# EAGLE board Door_switch_v1 (EAGLE 7.2.0)
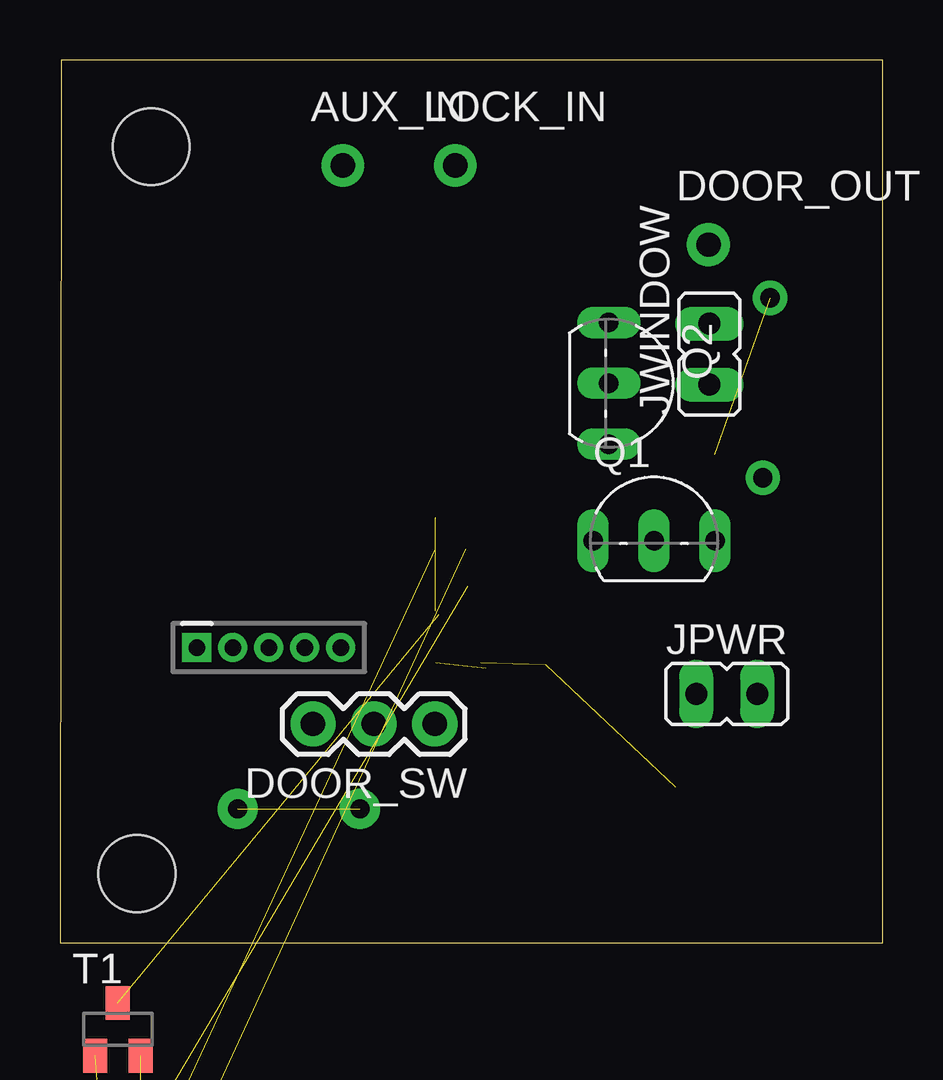
[diagram p0: board, top side]
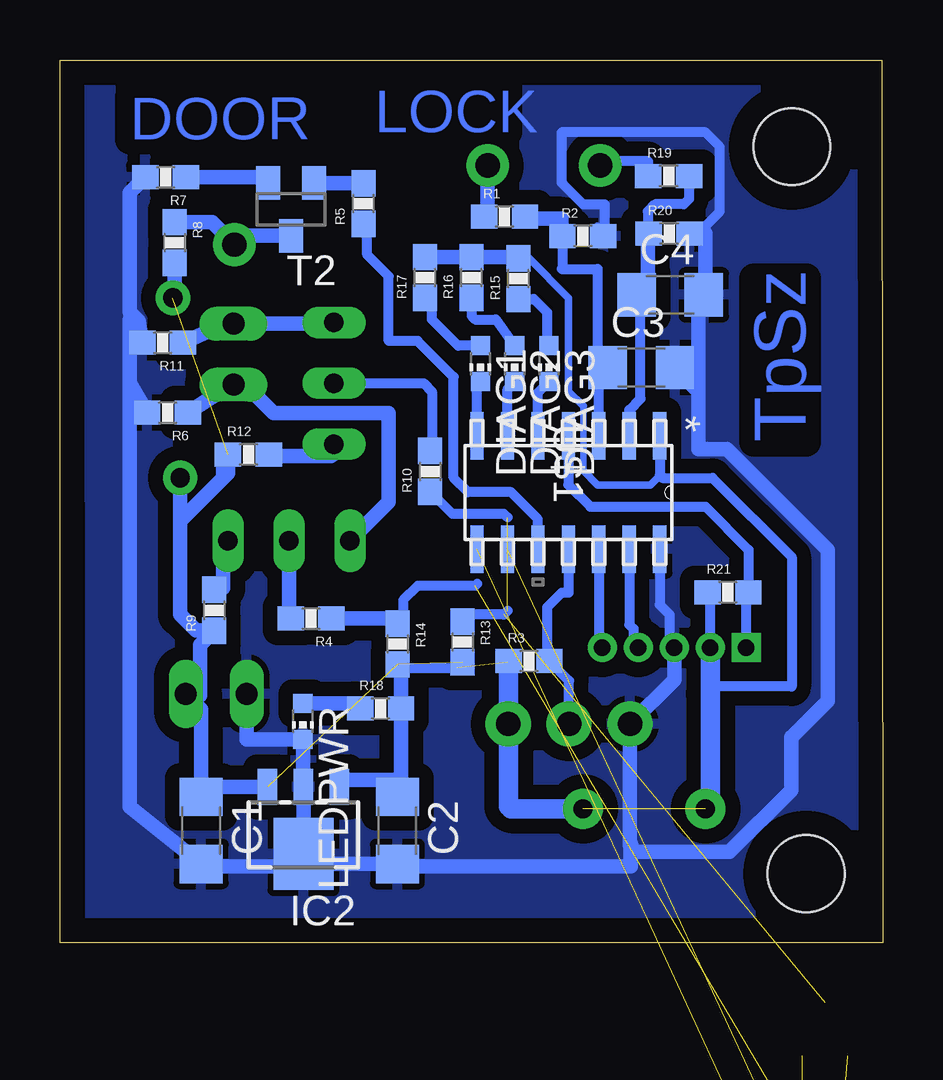
[diagram p1: board, bottom side, seen from below]

Size 34.31 x 36.81 mm. Coordinates in mm from the lower left corner, seen from the top.
Outline: 0,0 34.31,0.02 34.31,36.81 0.04,36.81 0,0
Copper layers (1*16): Top 0.035mm / dielectric 1.5mm / Bottom 0.035mm
Design rules "default": minimum track width 10mil, minimum drill 24mil, track to track 8mil, track to pad 8mil, pad to pad 8mil, via to via 8mil, smd to smd 8mil, copper to edge 40mil, drill to drill 8mil, minimum pad ring 10mil, minimum via ring 8mil, stop-mask expansion 4mil, vias tented up to drill 0mil, thermal gap 10mil
Holes 3.2 mm at 3.2,2.89 3.8,33.19

## Footprints (pad centres in the part's own frame; a part is rotated, then mirrored left to right if it is on the bottom)
1X01-CLEANBIG = drill 1.016 pad 1.778: 1 0,0
C1206 = smd 1.6 x 1.8: 1 -1.4,0; 2 1.4,0
CHIP-LED0603 = smd 0.8 x 0.8: A 0,-0.75; C 0,0.75
1X03 = drill 1.016 pad 1.88: 1 0,0; 2 2.54,0; 3 5.08,0
SOT89 = smd 0.8 x 1.5: 1 -1.5,-1.75; 2 0,-1.75; 3 1.5,-1.75 | smd 2.5 x 3: 4 0,1.05
PIC-ICSP-MINI = drill 0.7 square: 1 -3,0 | drill 0.7: 2 -1.5,0; 3 0,0; 4 1.5,0; 5 3,0
JP1 = drill 0.914 long: 1 0,-1.27; 2 0,1.27
TO92-EBC = drill 0.813 long: B 0,-1.27; C -2.54,-1.27; E 2.54,-1.27
0603-RES = smd 1.1 x 1: 1 -0.85,0; 2 0.85,0
SOT23 = smd 1 x 1.4: 1 -0.95,-1.1; 2 0.95,-1.1; 3 0,1.1
SOIC14-N_MC = smd 1.981 x 0.559: 1 -2.362,3.81; 2 -2.362,2.54; 3 -2.362,1.27; 4 -2.362,0; 5 -2.362,-1.27; 6 -2.362,-2.54; 7 -2.362,-3.81; 8 2.362,-3.81; 9 2.362,-2.54; 10 2.362,-1.27; 11 2.362,0; 12 2.362,1.27; 13 2.362,2.54; 14 2.362,3.81

## Placement (x,y rotation side)
AUX_IN  [1X01-CLEANBIG]  11.79,32.41 0 top
C1  [C1206]  28.42,4.69 270 bottom
C2  [C1206]  20.24,4.69 270 bottom
C3  [C1206]  10.07,23.98 0 bottom
C4  [C1206]  8.87,27.02 0 bottom
DIAG1  [CHIP-LED0603]  16.78,24.15 180 bottom
DIAG2  [CHIP-LED0603]  15.35,24.15 180 bottom
DIAG3  [CHIP-LED0603]  13.92,24.15 180 bottom
DOOR_OUT  [1X01-CLEANBIG]  27.03,29.11 0 top
DOOR_SW  [1X03]  15.62,9.13 180 top
IC2  L78LXXCU/BU  [SOT89]  24.16,4.76 180 bottom
ICSP  PIC-ICSP-MINI  [PIC-ICSP-MINI]  8.7,12.31 0 top
JPWR  [JP1]  27.79,10.38 270 top
JWINDOW  [JP1]  27.07,24.54 0 top
LEDPWR  [CHIP-LED0603]  24.18,9.24 180 bottom
LOCK_IN  [1X01-CLEANBIG]  16.48,32.41 0 top
Q1  BC327  [TO92-EBC]  24.76,18.04 0 top
Q2  BC327  [TO92-EBC]  24.15,23.33 270 top
R1  33k  [0603-RES]  15.77,30.27 0 bottom
R2  10k  [0603-RES]  12.51,29.46 0 bottom
R3  10k  [0603-RES]  14.75,11.75 0 bottom
R4  10k  [0603-RES]  23.84,13.53 180 bottom
R5  10k  [0603-RES]  21.66,30.82 90 bottom
R6  10k  [0603-RES]  29.82,22.11 180 bottom
R7  100  [0603-RES]  29.9,31.92 180 bottom
R8  10k  [0603-RES]  29.53,29.2 270 bottom
R9  100  [0603-RES]  27.87,13.87 90 bottom
R10  10k  [0603-RES]  18.87,19.66 90 bottom
R11  10k  [0603-RES]  30.03,25.02 180 bottom
R12  100  [0603-RES]  26.45,20.36 0 bottom
R13  10k  [0603-RES]  17.53,12.55 270 bottom
R14  10k  [0603-RES]  20.23,12.46 270 bottom
R15  10k  [0603-RES]  15.19,27.69 90 bottom
R16  10k  [0603-RES]  17.15,27.74 90 bottom
R17  10k  [0603-RES]  19.09,27.74 90 bottom
R18  10k  [0603-RES]  20.94,9.77 0 bottom
R19  33k  [0603-RES]  8.93,31.97 0 bottom
R20  10k  [0603-RES]  8.91,29.57 0 bottom
R21  10k  [0603-RES]  6.46,14.62 0 bottom
R22  10k  [0603-RES]  1.52,-15.87 0 top  (outside the outline)
R23  10k  [0603-RES]  1.52,-18.82 0 top  (outside the outline)
T1  BC846  [SOT23]  2.41,-3.6 0 top
T2  BC846  [SOT23]  24.67,30.58 180 bottom
T3  BC846  [SOT23]  2.41,-10.88 0 top  (outside the outline)
U$1  PIC16F505-X/SL  [SOIC14-N_MC]  13.11,18.78 270 bottom

## Library data of the parts
AUX_IN DIAG1-DIAG3 DOOR_OUT LEDPWR LOCK_IN = adafruit
C1-C4 = eagle-ltspice; SPICEMODEL: NONE; SPICEPREFIX: C
DOOR_SW ICSP R1-R23 = SparkFun
IC2 = v-reg-2
JPWR JWINDOW = jumper
Q1 Q2 = transistor-pnp
T1-T3 = transistor
U$1 = PIC16F505_SOIC

## Nets
+5V: C2.1 DOOR_SW.1 IC2.1 ICSP.2 R3.1 R15.2 R16.2 R17.2 R18.2 R21.1 U$1.1
+15V: C1.1 IC2.3 JPWR.2 R8.2 R9.1 R12.1 R13.2 R14.2
AUX: C4.1 R19.2 R20.1 U$1.2
AUX_IN: AUX_IN.1 R19.1
DIAG1: DIAG1.C U$1.7
DIAG2: DIAG2.C U$1.6
DIAG3: DIAG3.C U$1.5
DO: R5.1 U$1.10
DOOR_OUT: DOOR_OUT.1 R8.1 T2.3
DOOR_SW: DOOR_SW.2 R3.2 U$1.11
FRAME: C1.2 C2.2 C3.2 C4.2 DOOR_SW.3 IC2.2 IC2.4 ICSP.3 JPWR.1 LEDPWR.C R2.2 R6.2 R7.2 R11.2 R20.2 U$1.14
GND: T1.2 T3.2
LOCK_IN: LOCK_IN.1 R1.1
LOCK_SW: C3.1 R1.2 R2.1 U$1.3
MCLR: ICSP.1 R21.2 U$1.4
N$2: Q2.B R10.2
N$3: JWINDOW.2 Q2.C R11.1
N$4: R7.1 T2.2
N$5: R5.2 T2.1
N$6: Q2.E R12.2
N$7: DIAG3.A R15.1
N$8: DIAG2.A R16.1
N$9: Q1.B R4.2
N$10: JWINDOW.1 Q1.C R6.1
N$11: Q1.E R9.2
N$12: DIAG1.A R17.1
N$13: LEDPWR.A R18.1
N$15: R22.2 T1.1
N$16: R23.2 T3.1
PGC: ICSP.5 U$1.12
PGD: ICSP.4 U$1.13
W1: R22.1 U$1.9
W2: R23.1 U$1.8
WIN1: R10.1 R13.1 T1.3
WIN2: R4.1 R14.1 T3.3

## Tracks (layer width: path | path; a pad name or v marks a point on that pad's centre or on a via)
+5V  (via drill 0.8 pad 1.68)  (2 unrouted)
  Bottom 0.27: 12.48,22.39 12.48,19.69
  Bottom 0.305: R15.2 14.75,28.54 13.1,26.89 13.1,22.99 12.48,22.39 | 12.48,19.69 11.9,19.09 9.7,19.09 9.3,19.49
  Bottom 0.406: 20.09,11.47 17.76,11.47 | ICSP.2 7.2,14.51 R21.1 | DOOR_SW.1 15.62,11.73 R3.1 15.65,11.7 | U$1.1 9.3,19.49 9.2,19.39 7.1,19.39 3.8,16.09 3.8,10.69 6.9,10.69 7.2,10.39
  Bottom 0.61: IC2.1 22.66,6.79 20.3,6.79 | 20.3,6.79 20.3,6.09 C2.1 | 20.3,6.79 20.09,6.79 R18.2 20.09,11.47 | R17.2 R16.2 15.24,28.59 R15.2
  Bottom 0.813: R3.1 15.6,5.69 15.5,5.59 v12.5,5.59 | ICSP.2 7.2,10.39 7.2,5.79 7.4,5.59
+15V  (via drill 0.8 pad 1.42)  (3 unrouted)
  Bottom 0.61: C1.1 28.42,6.51 | 28.42,6.51 IC2.3 | 28.42,6.51 28.42,9.74 JPWR.2 28.46,10.31 28.46,12.43 R9.1 28.63,13.02 29.3,13.69 29.3,17.59 | 27.5,19.39 27.5,20.16 R12.1 27.3,19.59 27.5,19.39 | 27.5,19.39 29.3,17.59 | 29.3,17.59 v29.3,19.39 | R8.2 29.53,26.96 29.6,26.89
AUX
  Bottom 0.406: U$1.2 10.57,22.22 10.1,22.69 10.1,26.85 C4.1 | R19.2 8.08,31.01 8.3,30.79 9.5,30.79 9.8,30.49 9.8,29.61 R20.1
  Bottom 0.61: C4.1 9.97,27.02 9.8,27.19 9.8,29.53 R20.1
AUX_IN
  Bottom 0.406: R19.1 9.78,32.57 9.8,32.59 11.61,32.59 AUX_IN.1
DIAG1
  Bottom 0.406: U$1.7 16.92,23.26 DIAG1.C
DIAG2
  Bottom 0.406: U$1.6 15.65,23.1 DIAG2.C
DIAG3
  Bottom 0.406: U$1.5 14.38,22.94 DIAG3.C
DO
  Bottom 0.406: U$1.10 14.38,17.67 15.5,18.79 17.3,18.79 17.9,19.39 17.9,23.59 19.4,25.09 20.6,25.09 20.6,27.79 21.5,28.69 21.5,29.81 R5.1
DOOR_OUT
  Bottom 0.61: T2.3 26.66,29.48 DOOR_OUT.1 27.97,30.05 R8.1
DOOR_SW
  Bottom 0.406: U$1.11 13.11,14.6 13.1,14.59 13.4,14.59 14,13.99 14,11.85 R3.2 13.08,10.93 DOOR_SW.2
FRAME
  Bottom 0.406: U$1.14 9.3,14.09 8.9,13.69 8.9,12.51 ICSP.3 | 7.4,29.59 7.4,29.89 6.8,30.49 6.8,33.19 7.4,33.79 13.4,33.79 13.4,31.69 12.5,30.79 11.6,30.79 11.6,29.52 R2.2 11.9,29.82
  Bottom 0.61: IC2.4 24.16,3.29 C2.2 20.14,3.19 10.5,3.19 10.54,4.25 | IC2.4 24.2,3.71 24.2,3.19 28.42,3.19 C1.2 31.4,5.67 31.4,23.29 | IC2.4 IC2.2 24.18,6.51 LEDPWR.C 26.52,8.49 JPWR.1 | 31.4,23.29 31.4,25.99 31.33,25.92 R11.2 31.03,25.92 31.4,26.29 31.4,31.27 R7.2 | R6.2 31.38,23.31 31.4,23.29 | ICSP.3 8.7,10.97 DOOR_SW.3 10.54,4.25 | 7.7,22.99 7.7,20.59 6.5,20.59 2.3,16.39 2.3,10.09 3.8,8.59 3.83,8.59 3.83,6.36 6.4,3.8 10.38,3.8 10.38,3.79 10.54,4.25 | C3.2 8.67,23.96 7.7,22.99 | 7.7,22.99 7.7,26.79 C4.2 7.4,27.09 7.4,29.59 7.42,29.57 R20.2
  pour Bottom (isolate 0.61): 33.26,0.59 33.2,35.89 1.1,35.89 1.1,0.49
GND  (1 unrouted)
LOCK_IN
  Bottom 0.61: R1.1 16.48,30.27 LOCK_IN.1
LOCK_SW
  Bottom 0.406: U$1.3 11.84,23.71 C3.1 11.9,24.41 11.9,28.09 13.4,28.09 13.36,28.13 R2.1
  Bottom 0.61: R2.1 13.4,29.46 13.4,30.19 14.92,30.19 R1.2
MCLR
  Bottom 0.406: ICSP.1 5.7,14.53 R21.2 5.6,16.39 7.4,18.19 12.2,18.19 13.11,19.1 U$1.4
N$1  (via drill 0.8 pad 1.68)
  other vias: 7.4,5.59
N$2
  Bottom 0.406: Q2.B 19.14,23.33 18.8,22.99 18.8,20.58 R10.2
N$3
  Bottom 0.61: Q2.C 22.94,25.81 JWINDOW.2 27.18,25.92 R11.1
N$4
  Bottom 0.61: R7.1 25.86,31.92 T2.2
N$5
  Bottom 0.61: T2.1 R5.2
N$6
  Bottom 0.61: Q2.E 22.88,20.41 23,20.29 25.53,20.29 R12.2
N$7
  Bottom 0.406: R15.1 14.55,26.84 14,26.29 14,24.98 DIAG3.A
N$8
  Bottom 0.406: R16.1 17.15,26.14 17,25.99 16.14,25.99 DIAG2.A
N$9
  Bottom 0.61: Q1.B 24.76,13.6 R4.2
N$10
  Bottom 0.61: R6.1 27.11,23.31 JWINDOW.1 26.58,23.27 25.4,22.09 20.6,22.09 20.6,18.39 Q1.C
N$11
  Bottom 0.61: Q1.E 27.42,16.77 27.5,16.69 27.5,14.79 R9.2
N$12
  Bottom 0.406: DIAG1.A 17.71,24.9 18.8,25.99 18.8,26.6 R17.1
N$13
  Bottom 0.61: LEDPWR.A 22.01,9.99 R18.1
N$14  (via drill 0.8 pad 1.42)
  other vias: 29.6,26.89
N$15  (1 unrouted)
N$16  (1 unrouted)
PGC
  Bottom 0.406: U$1.12 11.84,12.45 ICSP.5
PGD
  Bottom 0.406: U$1.13 10.57,13.26 10.4,13.09 10.4,12.51 ICSP.4
W1  (1 unrouted)
W2  (1 unrouted)
WIN1  (2 unrouted)
  Bottom 0.406: 15.65,13.84 15.8,13.69 17.24,13.69 R13.1 | 15.65,17.74 15.8,17.89 17.95,17.89 R10.1
WIN2  (1 unrouted)
  Bottom 0.406: 16.92,14.97 17,14.89 19.4,14.89 20,14.29 20,13.54 R14.1
  Bottom 0.61: R4.1 20.45,13.53 R14.1

## Text on the board
Bottom: LOCK | DOOR | TpSz